# Altium PCB board.PcbDoc (part 1 of 2)
Units mm, origin at the board's own origin, x right, y up, seen from the top; angles counter-clockwise.
Board outline 37.92 x 150 mm, 2 copper layers (Top Layer, Bottom Layer), stack 1.66 mm thick; 126 components, 64 nets, 338 pads, 180 vias.
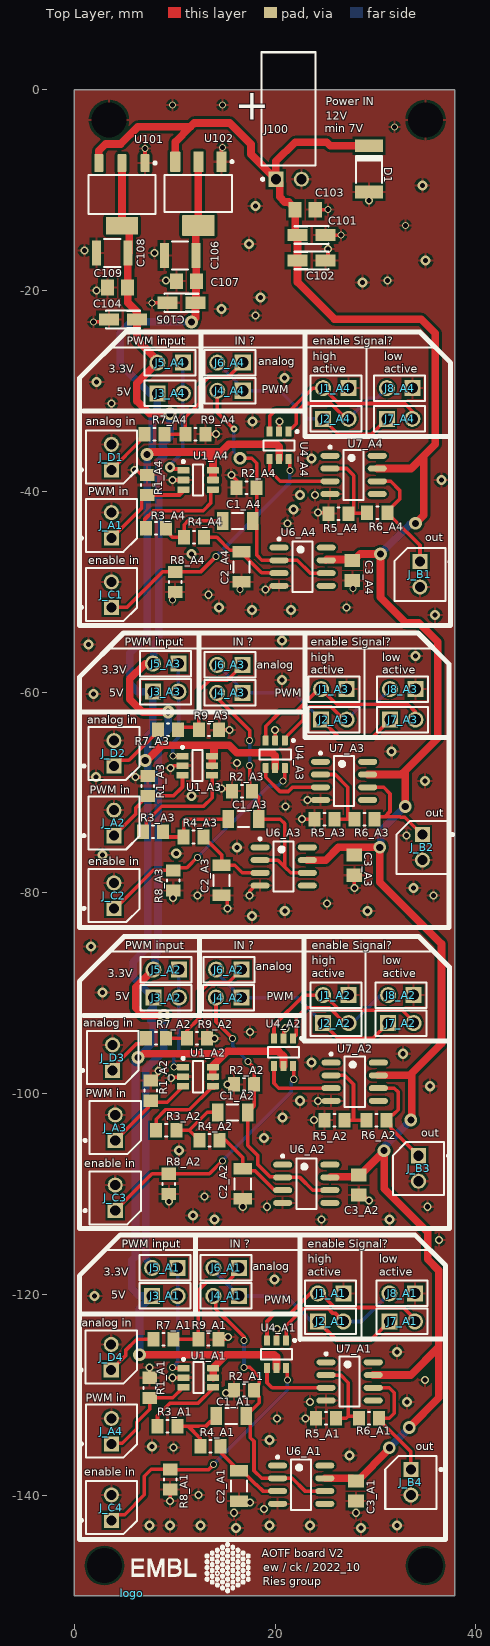
[diagram p0: Top Layer view]
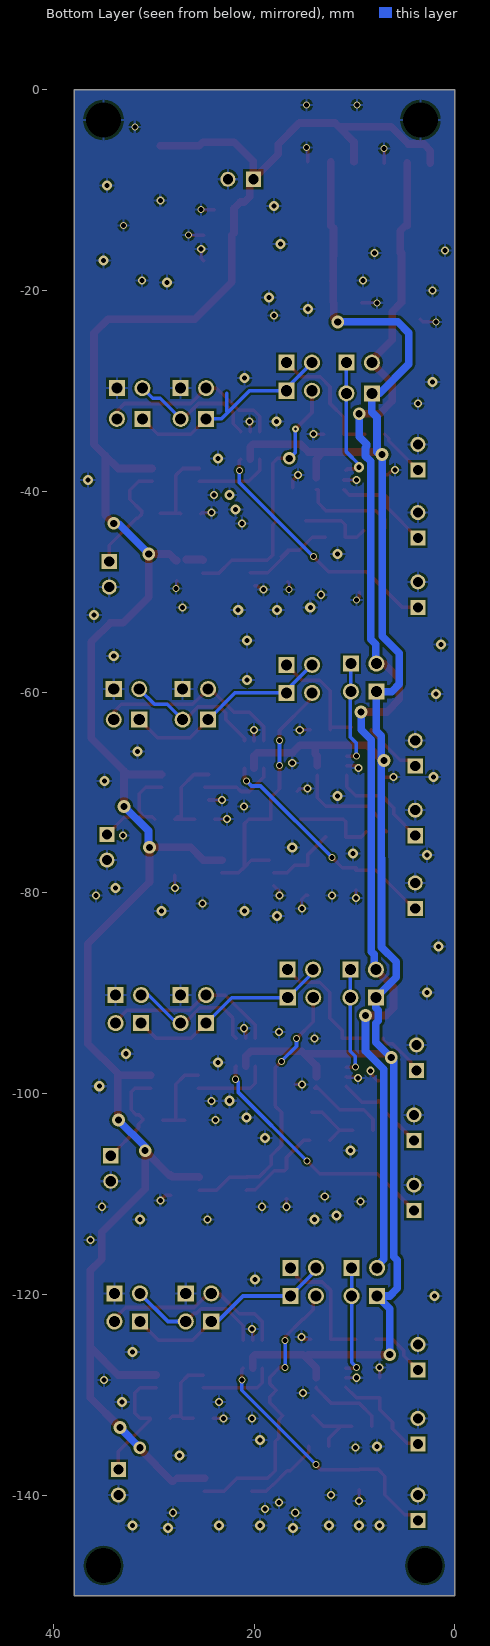
[diagram p1: Bottom Layer view, seen from below]
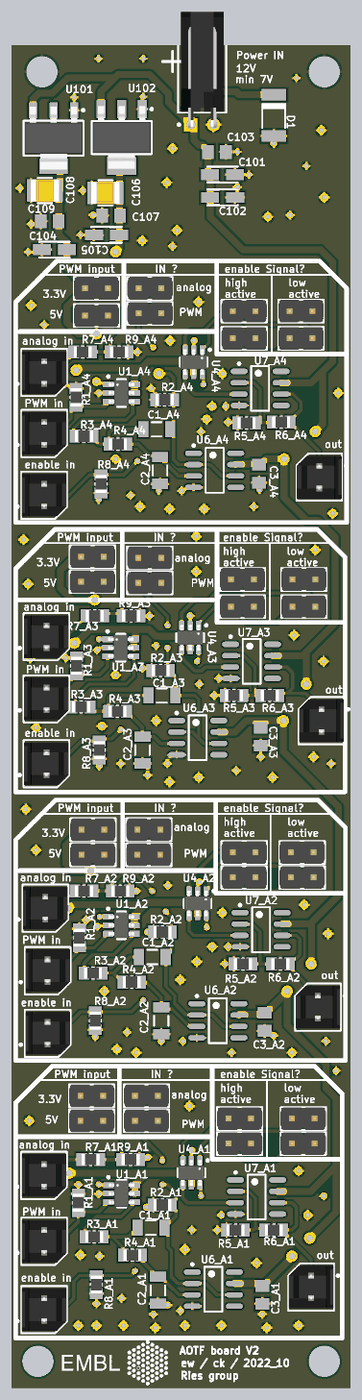
[diagram p3: 3D render of the assembled board from above, using the file's embedded part models]

## Layer stack, top to bottom
Top Solder: solder mask 0.0102, Solder Resist, Dk 3.5
Top Layer: signal copper 0.055
Dielectric1: dielectric 1.55, FR-4, Dk 4.8
Bottom Layer: signal copper 0.055
Bottom Solder: solder mask 0.0102, Solder Resist, Dk 3.5

## Board outline
0,-150 0,0 37.924,0 37.924,-150

## Design rules (kind name [scope] priority, off if disabled: settings)
Clearance clearance_polygons [InNamedPolygon('top_gnd_power')or InNamedPolygon('bottom_gnd_power') vs InNamedPolygon('top_gnd_uc')or InNamedPolygon('bottom_gnd_uc')] p1: gap=1.5 ignorepadtopadclearanceinfootprint=FALSE except(0: Arc-Hole Track-Hole SMDPad-Hole THPad-Hole Via-Hole Fill-Hole Poly-Hole Region-Hole Text-Hole)
Clearance ClearanceRoom [WithinRoom('less')  or WithinRoom('less1') or WithinRoom('less2') or WithinRoom('less3') or WithinRoom('less4')] p2: gap=0.203 ignorepadtopadclearanceinfootprint=FALSE except(0: Arc-Hole Track-Hole SMDPad-Hole THPad-Hole Via-Hole Fill-Hole Poly-Hole Region-Hole Text-Hole)
Clearance clearance_HP_class [InNetClass('high_power_net')] p3: gap=0.381 ignorepadtopadclearanceinfootprint=FALSE except(0: Arc-Hole Track-Hole SMDPad-Hole THPad-Hole Via-Hole Fill-Hole Poly-Hole Region-Hole Text-Hole)
Clearance "clearance_24V class" [InNetClass('24V_net')] p4: gap=0.254 ignorepadtopadclearanceinfootprint=FALSE except(0: Arc-Hole Track-Hole SMDPad-Hole THPad-Hole Via-Hole Fill-Hole Poly-Hole Region-Hole Text-Hole)
Clearance Clearance_1 [All] p5: gap=0.203 ignorepadtopadclearanceinfootprint=FALSE except(0: Arc-Hole Track-Hole SMDPad-Hole THPad-Hole Via-Hole Fill-Hole Poly-Hole Region-Hole Text-Hole)
FabricationTestPointUsage TestPointUsage [All] p1: valid=0 allowmultiple=FALSE
FabricationTestpoint Testpoint [All] p1: side=3 testpointundercomponent=TRUE minsize=1.016 maxsize=2.54 preferedsize=1.524 minholesize=0 maxholesize=1.016 preferedholesize=0.813 testpointgrid=0.025 allowsidetop=TRUE allowsidebottom=TRUE usegrid=TRUE gridtolerance=0
HoleSize [All] p1: absolutevalues=TRUE maxlimit=6 minlimit=0.025 maxpercent=80.000 minpercent=20.000
PolygonConnect PolygonConnect_Power [(InNet('+5V') OR InNet('-24VBUS'))] p1: connectstyle=Relief reliefconductorwidth=2.54 reliefentries=4 polygonreliefangle="90 Angle" airgapwidth=0.254
PolygonConnect [All] p2: connectstyle=Relief reliefconductorwidth=0.254 reliefentries=4 polygonreliefangle="90 Angle" airgapwidth=0.254
RoutingVias "RoutingVias_24V class" [InNetClass('24V_net')] p1: holewidth=0.711 width=1.27 viastyle="Through Hole" minholewidth=0.711 minwidth=1.27 maxholewidth=0.711 maxwidth=1.27
RoutingVias [All] p2: holewidth=0.711 width=1.27 viastyle="Through Hole" minholewidth=0.3 minwidth=0.5 maxholewidth=0.711 maxwidth=1.27
SilkToSolderMaskClearance SilkscreenOverComponentPads [IsPad] p1: minsilkscreentomaskgap=0.254 clearancetoexposedcopper=TRUE
SolderMaskExpansion [All] p1: expansion=0.102 istentingtop=FALSE
Width WidthRoom [WithinRoom('less')  or WithinRoom('less1') or WithinRoom('less2') or WithinRoom('less3') or WithinRoom('less4')] p1: maxlimit=0.356 minlimit=0.356 preferedwidth=0.356
Width Width_HC_class [InNetClass('High_Current_net')] p2: maxlimit=15.24 minlimit=1.524 preferedwidth=1.524
Width Width_HP_class [InNetClass('High_Power_net')] p3: maxlimit=1.016 minlimit=1.016 preferedwidth=1.016
Width "Width_24V class" [InNetClass('24V_net')] p4: maxlimit=0.762 minlimit=0.356 preferedwidth=0.762
Width Width_1 [All] p5: maxlimit=0.356 minlimit=0.356 preferedwidth=0.356
26 further rules are at their usual default settings.

## Classes and differential pairs
component class A1: C1_A1 C2_A1 C3_A1 J1_A1 J2_A1 J3_A1 J4_A1 J5_A1 J6_A1 J7_A1 J8_A1 R1_A1 R2_A1 R3_A1 R4_A1 R5_A1 R6_A1 R7_A1 R8_A1 R9_A1 U1_A1 U4_A1 U6_A1 U7_A1
component class A3: C1_A3 C2_A3 C3_A3 J1_A3 J2_A3 J3_A3 J4_A3 J5_A3 J6_A3 J7_A3 J8_A3 R1_A3 R2_A3 R3_A3 R4_A3 R5_A3 R6_A3 R7_A3 R8_A3 R9_A3 U1_A3 U4_A3 U6_A3 U7_A3
channel class Sheet1: A1 A2 A3 A4
component class A2: C1_A2 C2_A2 C3_A2 J1_A2 J2_A2 J3_A2 J4_A2 J5_A2 J6_A2 J7_A2 J8_A2 R1_A2 R2_A2 R3_A2 R4_A2 R5_A2 R6_A2 R7_A2 R8_A2 R9_A2 U1_A2 U4_A2 U6_A2 U7_A2
component class A4: C1_A4 C2_A4 C3_A4 J1_A4 J2_A4 J3_A4 J4_A4 J5_A4 J6_A4 J7_A4 J8_A4 R1_A4 R2_A4 R3_A4 R4_A4 R5_A4 R6_A4 R7_A4 R8_A4 R9_A4 U1_A4 U4_A4 U6_A4 U7_A4
net class 24V_net: +3,3V +5V +12V
component class sheetPower: C101 C102 C103 C104 C105 C106 C107 C108 C109 D1 J100 U101 U102
component class sheet_top: J_A1 J_A2 J_A3 J_A4 J_B1 J_B2 J_B3 J_B4 J_B6 J_C1 J_C2 J_C3 J_C4 J_D1 J_D2 J_D3 J_D4

## Components (designator, comment, footprint, x,y, rotation, side; value= is the part's Value field where it differs from the comment)
C1_A1 "2.25uF" CAPC1206(3216)190_N 15.64,-132.08 r0 top (schematic designator C1)
C1_A2 "2.25uF" CAPC1206(3216)190_N 15.783,-101.854 r0 top (schematic designator C1)
C1_A3 "2.25uF" CAPC1206(3216)190_N 16.858,-72.644 r0 top (schematic designator C1)
C1_A4 "2.25uF" CAPC1206(3216)190_N 16.269,-42.926 r0 top (schematic designator C1)
C2_A1 "1.13uF" CAPC1206(3216)190_N 16.402,-139.065 r90 top (schematic designator C2)
C2_A2 "1.13uF" CAPC1206(3216)190_N 16.783,-108.966 r90 top (schematic designator C2)
C2_A3 "1.13uF" CAPC1206(3216)190_N 14.685,-78.74 r90 top (schematic designator C2)
C2_A4 "1.13uF" CAPC1206(3216)190_N 16.656,-47.514 r90 top (schematic designator C2)
C3_A1 "100nF" CAPC2013X88X50ML20T25 28.067,-139.573 r90 top (schematic designator C3)
C3_A2 "100nF" CAPC2013X88X50ML20T25 28.34,-109.093 r90 top (schematic designator C3)
C3_A3 "100nF" CAPC2013X88X50ML20T25 27.893,-77.232 r90 top (schematic designator C3)
C3_A4 "100nF" CAPC2013X88X50ML20T25 27.705,-47.879 r90 top (schematic designator C3)
C101 "4,7 µF" "A Package" 22.238,-14.478 r0 top
C102 "4,7 µF" "A Package" 22.244,-17.018 r0 top
C103 "100n" CAPC2013X88X50ML20T25 23.006,-11.938 r180 top
C104 "4,7 µF" "A Package" 6.248,-22.86 r180 top
C105 "4,7 µF" "A Package" 12.071,-21.209 r180 top
C106 "100uF 6.3V 1210" 885012109004-Footprint-1 9.004,-16.51 r0 top
C107 "100n" CAPC2013X88X50ML20T25 11.176,-19.05 r0 top
C108 "100uF 6.3V 1210" 885012109004-Footprint-1 2.234,-16.256 r0 top
C109 "100n" CAPC2013X88X50ML20T25 4.318,-19.685 r0 top
D1 "LL4007" LL4007 29.356,-10.16 r90 top
J1_A1 "61300211121" 61300211121 26.816,-119.888 r180 top (schematic designator J1)
J1_A2 "61300211121" 61300211121 27.324,-90.17 r180 top (schematic designator J1)
J1_A3 "61300211121" 61300211121 27.131,-59.69 r180 top (schematic designator J1)
J1_A4 "61300211121" 61300211121 27.324,-29.718 r180 top (schematic designator J1)
J2_A1 "61300211121" 61300211121 24.276,-122.682 r0 top (schematic designator J2)
J2_A2 "61300211121" 61300211121 24.784,-92.964 r0 top (schematic designator J2)
J2_A3 "61300211121" 61300211121 24.591,-62.738 r0 top (schematic designator J2)
J2_A4 "61300211121" 61300211121 24.784,-32.766 r0 top (schematic designator J2)
J3_A1 "61300211121" 61300211121 7.75,-120.142 r0 top (schematic designator J3)
J3_A2 "61300211121" 61300211121 7.877,-90.424 r0 top (schematic designator J3)
J3_A3 "61300211121" 61300211121 7.827,-59.944 r0 top (schematic designator J3)
J3_A4 "61300211121" 61300211121 8.274,-30.226 r0 top (schematic designator J3)
J4_A1 "61300211121" 61300211121 16.402,-120.142 r180 top (schematic designator J4)
J4_A2 "61300211121" 61300211121 16.656,-90.424 r180 top (schematic designator J4)
J4_A3 "61300211121" 61300211121 16.778,-60.071 r180 top (schematic designator J4)
J4_A4 "61300211121" 61300211121 16.783,-29.972 r180 top (schematic designator J4)
J5_A1 "61300211121" 61300211121 10.29,-117.348 r180 top (schematic designator J5)
J5_A2 "61300211121" 61300211121 10.417,-87.63 r180 top (schematic designator J5)
J5_A3 "61300211121" 61300211121 10.367,-57.15 r180 top (schematic designator J5)
J5_A4 "61300211121" 61300211121 10.814,-27.178 r180 top (schematic designator J5)
J6_A1 "61300211121" 61300211121 16.402,-117.348 r180 top (schematic designator J6)
J6_A2 "61300211121" 61300211121 16.672,-87.63 r180 top (schematic designator J6)
J6_A3 "61300211121" 61300211121 16.778,-57.277 r180 top (schematic designator J6)
J6_A4 "61300211121" 61300211121 16.783,-27.178 r180 top (schematic designator J6)
J7_A1 "61300211121" 61300211121 31.388,-122.682 r0 top (schematic designator J7)
J7_A2 "61300211121" 61300211121 31.261,-92.964 r0 top (schematic designator J7)
J7_A3 "61300211121" 61300211121 31.449,-62.738 r0 top (schematic designator J7)
J7_A4 "61300211121" 61300211121 31.134,-32.766 r0 top (schematic designator J7)
J8_A1 "61300211121" 61300211121 33.928,-119.888 r180 top (schematic designator J8)
J8_A2 "61300211121" 61300211121 33.801,-90.17 r180 top (schematic designator J8)
J8_A3 "61300211121" 61300211121 33.989,-59.69 r180 top (schematic designator J8)
J8_A4 "61300211121" 61300211121 33.674,-29.718 r180 top (schematic designator J8)
J100 "66100211722" 66100211722 21.355,-1.905 r180 top
J_A1 "66100211622" 66100211622 3.702,-44.658 r270 top
J_A2 "66100211622" 66100211622 3.956,-74.295 r270 top
J_A3 "66100211622" 66100211622 4.083,-104.648 r270 top
J_A4 "66100211622" 66100211622 3.702,-134.874 r270 top
J_B1 "66100211622" 66100211622 34.436,-46.99 r90 top
J_B2 "66100211622" 66100211622 34.67,-74.183 r90 top
J_B3 "66100211622" 66100211622 34.29,-106.172 r90 top
J_B4 "66100211622" 66100211622 33.528,-137.43 r90 top
J_C1 "66100211622" 66100211622 3.702,-51.554 r270 top
J_C2 "66100211622" 66100211622 3.956,-81.534 r270 top
J_C3 "66100211622" 66100211622 4.083,-111.633 r270 top
J_C4 "66100211622" 66100211622 3.702,-142.494 r270 top
J_D1 "66100211622" 66100211622 3.702,-37.846 r270 top
J_D2 "66100211622" 66100211622 3.956,-67.354 r270 top
J_D3 "66100211622" 66100211622 3.829,-97.663 r270 top
J_D4 "66100211622" 66100211622 3.683,-127.508 r270 top
logo "EMBL" EMBL 5.715,-149.733 r0 top
R1_A1 "10k" YAGO-RC0805_M 7.512,-129.286 r270 top (schematic designator R1)
R1_A2 "10k" YAGO-RC0805_M 7.62,-99.695 r270 top (schematic designator R1)
R1_A3 "10k" YAGO-RC0805_M 7.319,-69.326 r270 top (schematic designator R1)
R1_A4 "10k" YAGO-RC0805_M 7.258,-39.354 r270 top (schematic designator R1)
R2_A1 "10k" YAGO-RC0805_M 16.91,-129.54 r0 top (schematic designator R2)
R2_A2 "10k" YAGO-RC0805_M 16.924,-99.06 r0 top (schematic designator R2)
R2_A3 "10k" YAGO-RC0805_M 16.717,-69.85 r0 top (schematic designator R2)
R2_A4 "10k" YAGO-RC0805_M 17.164,-39.624 r0 top (schematic designator R2)
R3_A1 "10k" YAGO-RC0805_M 9.29,-133.096 r180 top (schematic designator R3)
R3_A2 "10k" YAGO-RC0805_M 9.163,-103.632 r180 top (schematic designator R3)
R3_A3 "10k" YAGO-RC0805_M 7.827,-73.914 r180 top (schematic designator R3)
R3_A4 "10k" YAGO-RC0805_M 8.147,-43.688 r180 top (schematic designator R3)
R4_A1 "10k" YAGO-RC0805_M 13.559,-135.128 r180 top (schematic designator R4)
R4_A2 "10k" YAGO-RC0805_M 13.481,-104.648 r180 top (schematic designator R4)
R4_A3 "10k" YAGO-RC0805_M 11.891,-74.422 r180 top (schematic designator R4)
R4_A4 "10k" YAGO-RC0805_M 11.941,-44.577 r180 top (schematic designator R4)
R5_A1 "1k" YAGO-RC0805_M 25.082,-132.334 r0 top (schematic designator R5)
R5_A2 "1k" YAGO-RC0805_M 25.908,-102.616 r0 top (schematic designator R5)
R5_A3 "1k" YAGO-RC0805_M 24.909,-72.644 r0 top (schematic designator R5)
R5_A4 "1k" YAGO-RC0805_M 26.308,-42.218 r0 top (schematic designator R5)
R6_A1 "1k" YAGO-RC0805_M 29.356,-132.334 r0 top (schematic designator R6)
R6_A2 "1k" YAGO-RC0805_M 30.099,-102.616 r0 top (schematic designator R6)
R6_A3 "1k" YAGO-RC0805_M 28.909,-72.644 r0 top (schematic designator R6)
R6_A4 "1k" YAGO-RC0805_M 30.182,-42.118 r0 top (schematic designator R6)
R7_A1 "1k" YAGO-RC0805_M 8.893,-124.46 r180 top (schematic designator R7)
R7_A2 "1k" YAGO-RC0805_M 8.147,-94.488 r180 top (schematic designator R7)
R7_A3 "1k" YAGO-RC0805_M 9.351,-63.754 r180 top (schematic designator R7)
R7_A4 "1k" YAGO-RC0805_M 8.004,-34.29 r180 top (schematic designator R7)
R8_A1 "10k" YAGO-RC0805_M 9.544,-138.43 r270 top (schematic designator R8)
R8_A2 "10k" YAGO-RC0805_M 9.417,-108.966 r270 top (schematic designator R8)
R8_A3 "10k" YAGO-RC0805_M 9.859,-78.74 r270 top (schematic designator R8)
R8_A4 "10k" YAGO-RC0805_M 10.052,-49.022 r270 top (schematic designator R8)
R9_A1 "1.5k" YAGO-RC0805_M 13.354,-124.46 r180 top (schematic designator R9)
R9_A2 "1.5k" YAGO-RC0805_M 12.211,-94.488 r180 top (schematic designator R9)
R9_A3 "1.5k" YAGO-RC0805_M 13.415,-63.754 r180 top (schematic designator R9)
R9_A4 "1.5k" YAGO-RC0805_M 12.068,-34.29 r180 top (schematic designator R9)
U1_A1 "SN74LVC1T45DBVT" DBV0006A_M 12.354,-128.27 r0 top (schematic designator U1)
U1_A2 "SN74LVC1T45DBVT" DBV0006A_M 12.324,-98.298 r0 top (schematic designator U1)
U1_A3 "SN74LVC1T45DBVT" DBV0006A_M 12.258,-67.31 r0 top (schematic designator U1)
U1_A4 "SN74LVC1T45DBVT" DBV0006A_M 12.338,-38.862 r0 top (schematic designator U1)
U4_A1 "SN74LVC1G3157" DBV0006A_N 21.101,-124.57 r270 top (schematic designator U4)
U4_A2 "SN74LVC1G3157" DBV0006A_N 21.797,-94.488 r270 top (schematic designator U4)
U4_A3 "SN74LVC1G3157" DBV0006A_N 20.969,-64.814 r270 top (schematic designator U4)
U4_A4 "SN74LVC1G3157" DBV0006A_N 21.355,-34.036 r270 top (schematic designator U4)
U6_A1 "AD8029ARZ" ADI-R-8_L 22.606,-138.938 r0 top (schematic designator U6)
U6_A2 "AD8029ARZ" ADI-R-8_L 23.114,-108.966 r0 top (schematic designator U6)
U6_A3 "AD8029ARZ" ADI-R-8_L 20.862,-77.358 r0 top (schematic designator U6)
U6_A4 "AD8029ARZ" ADI-R-8_L 22.752,-47.498 r0 top (schematic designator U6)
U7_A1 "AD8029ARZ" ADI-R-8_L 27.432,-128.651 r0 top (schematic designator U7)
U7_A2 "AD8029ARZ" ADI-R-8_L 27.94,-98.806 r0 top (schematic designator U7)
U7_A3 "AD8029ARZ" ADI-R-8_L 26.877,-68.834 r0 top (schematic designator U7)
U7_A4 "AD8029ARZ" ADI-R-8_L 27.832,-38.354 r0 top (schematic designator U7)
U101 "LM1117IMP-3.3/NOPB" DCY0004A_N 4.75,-10.414 r270 top
U102 "LM1117IMP-5.0/NOPB" DCY0004A_M 12.359,-10.335 r270 top

## Footprints (in the part's own frame and the unit in brackets; to place one, negate y for a bottom-side part, rotate by r counter-clockwise, add the part's x,y. Pads: shape width x height; smd on the part's side, far side on the other; paste and mask are expansions set on the pad)
61300211121 [mm] "2Pol; gerade; WR-PHD 2.54 mm THT Pin Header"
  rect 1.6x1.6 hole 1.1: 1(0,0)
  round 1.6 hole 1.1: 2(2.54,0)
  silkscreen extent -1.27,-1.27 3.81,1.27, body extent -1.27,-1.27 3.81,1.27, height 8.57
66100211622 [mm] "2 Pins, stehend 2.54mm Intercom Stiftleiste WR-WTB"
  rect 1.5x1.5 hole 1: 1(0,0)
  round 1.5 hole 1: 2(-2.54,0)
  silkscreen extent -3.91,-3.12 1.37,2.55, body extent -3.66,-2.5 1.12,2.5, height 11.33
66100211722 [mm] "2.54 mm Intercom Male Right Angled Shrouded Locking Header, 2p"
  rect 1.5x1.5 hole 1: 1(1.27,7)
  round 1.5 hole 1: 2(-1.27,7)
  silkscreen extent -2.69,-5.65 2.72,7.12, body extent -2.39,-5.6 2.39,7.32, height 5.05
885012109004-Footprint-1 [mm]
  rect 0.9x2.5 smd: 1(0,0) 2(3.1,0)
  silkscreen extent 0.75,-1.4 2.35,1.4, body extent -0.05,-1.25 3.15,1.25, height 2.5
"A Package" [mm] "A Package; Low Density"
  rect 2x1.2 smd: 1(0,0) 2(2.8,0)
  silkscreen extent -0.3,-0.9 3.1,0.9
ADI-R-8_L [mm] "SOIC, 8-Leads, Body 4.9x3.9mm, Pitch 1.27mm, IPC High Density"
  oval 1.9x0.6 smd: 1(-2.35,1.905) 2(-2.35,0.635) 3(-2.35,-0.635) 4(-2.35,-1.905) 5(2.35,-1.905) 6(2.35,-0.635) 7(2.35,0.635) 8(2.35,1.905)
  silkscreen extent -2.47,-2.5 1,2.88, body extent -2,-2.5 2,2.5, height 1.75
CAPC1206(3216)190_N [mm] "Chip Capacitor, Body 3.2x1.6mm, Height 1.9mm, IPC Medium Density"
  rect 1.15x1.8 smd: 1(-1.5,0) 2(1.5,0)
  silkscreen extent -0.55,-0.8 0.55,0.8, body extent -1.7,-0.9 1.7,0.9, height 1.9
CAPC2013X88X50ML20T25 [mm] "Chip Capacitor, 2-Leads, Body 2.00x1.25mm, IPC Low Density"
  rect 1.3x1.55 smd: 1(-1,0) 2(1,0)
  body extent -1.1,-0.72 1.1,0.72, height 0.88
DBV0006A_M [mm] "SOT23, 6-Leads, Body 3.05x1.75mm, Pitch 0.95mm, IPC Low Density"
  rrect15% 1.2x0.65 smd: 1(-1.475,0.95) 2(-1.475,0) 3(-1.475,-0.95) 4(1.475,-0.95) 5(1.475,0) 6(1.475,0.95)
  silkscreen extent -1.6,-1.55 0.5,1.95, body extent -1.42,-1.46 1.42,1.46, height 1.11
DBV0006A_N [mm] "SOT23, 6-Leads, Body 3.05x1.75mm, Pitch 0.95mm, IPC Medium Density"
  rrect17% 1x0.6 smd: 1(0,0) 2(0,-0.95) 3(0,-1.9) 4(2.75,-1.9) 5(2.75,-0.95) 6(2.75,0)
  silkscreen extent -0.12,-2.5 1.88,0.98, body extent -0.05,-2.41 2.8,0.51, height 1.11
DCY0004A_M [mm] "SOT223, 4-Leads, Body 6.7x3.7mm, Pitch 2.3mm, IPC Low Density"
  rrect10% 2.05x1 smd: 1(-3.175,2.3) 2(-3.175,0) 3(-3.175,-2.3)
  rrect5% 2.05x3.25 smd: 4(3.175,0)
  silkscreen extent -3.3,-3.35 1.85,3.48, body extent -3.5,-3.25 3.5,3.25, height 1.62
DCY0004A_N [mm] "SOT223, 4-Leads, Body 6.7x3.7mm, Pitch 2.3mm, IPC Medium Density"
  rrect11% 1.75x0.9 smd: 1(-3.125,2.3) 2(-3.125,0) 3(-3.125,-2.3)
  rrect6% 1.75x3.2 smd: 4(3.125,0)
  silkscreen extent -3.25,-3.35 1.95,3.43, body extent -3.5,-3.25 3.5,3.25, height 1.62
EMBL [mm] "12 x 5mm"
  silkscreen extent -0.01,0.04 11.83,5.08
LL4007 [mm] "MELF Diode, 2-Leads, Body 5,00x2,50mm, IPC High Density"
  rect 1.279x2.75 smd: 1(0,0) 2(4.6,0)
  silkscreen extent 0.9,-1.28 3.57,1.28, body extent -0.3,-1.34 4.9,1.35, height 2.69
YAGO-RC0805_M [mm] "Chip Resistor, 2-Leads, Body 2.00x1.25mm, IPC Low Density"
  rect 1.2x1.45 smd: 1(-1,0) 2(1,0)
  silkscreen extent -0.1,-0.63 0.1,0.63, body extent -1,-0.62 1,0.63, height 0.6

## Part data
C1_A1 C1_A2 C1_A3 C1_A4 C2_A1 C2_A2 C2_A3 C2_A4: library part CMP-001-0138-A.1, "CAP CER 1UF 10V X7R 1206", Manufacturer="Wurth Electronics Inc.", Manufacturer Part Number=885012208013, Operating Temperature="-55°C ~ 125°C", Package / Case="1206 (3216 Metric)", Ratings=-, Supplier Part Number=732-7685-1-ND, Temperature Coefficient=X7R, Tolerance=±10%, Voltage - Rated=10V, Applications="General Purpose", ComponentLink1Description=885012208013.pdf, ComponentLink1URL=http://katalog.we-online.de/pbs/datasheet/885012208013.pdf, Features=-, Height - Seated (Max)=-, Lead Spacing=-, Lead Style=-, Mounting Type="Surface Mount, MLCC", Notification="Current market demand for these product types have resulted in fluctuating and extending lead times. Lead times may differ.", Packaging="Cut Tape (CT)", Part Status=Active, Size / Dimension="0.126\" L x 0.063\" W (3.20mm x 1.60mm)", Supplier=Digi-Key, Thickness (Max)="0.051\" (1.30mm)"
C3_A1 C3_A2 C3_A3 C3_A4 C103 C107 C109: library part CMP-001-0082-2, "generic 0805 COG oder X7R Vielschichtkondensatoren max. +/-10%"
C101 C102 C104 C105: library part CMP-001-0039-3, "4,7 µF; 6V; Gr. A; T491A475K006AT", Capacitance=4.7µF, ESR (Equivalent Series Resistance)="6 Ohm", Lifetime @ Temp.="2000 Hrs @ 85°C", Manufacturer=KEMET, Manufacturer Size Code=A, Operating Temperature="-55°C ~ 125°C", Package / Case="1206 (3216 Metric)", PartNumber=T491A475K006AT, Supplier Part Number=399-9717-1-ND, Tolerance=±10%, Voltage - Rated=6.3V, ComponentLink1Description=KEM_T2005_T491.pdf, ComponentLink1URL=http://www.kemet.com/Lists/ProductCatalog/Attachments/254/KEM_T2005_T491.pdf, Failure Rate=-, Features="General Purpose", Height - Seated (Max)="0.071\" (1.80mm)", Lead Spacing=-, Mounting Type="Surface Mount", Packaging="Cut Tape (CT)", Part Status=Active, Size / Dimension="0.126\" L x 0.063\" W (3.20mm x 1.60mm)", Supplier=Digi-Key, Type=Molded
C106 C108: library part CMP-001-0186-3, "Ceramic Capacitor, Ceramic, 100uF, 6.3V", Capacitor Type=Ceramic, PartNumber=885012109004, Dielectric Material=Ceramic, Number of Pins=2, REACH SVHC=Yes, RoHS Compliant=Yes
D1: library part CMP-001-0049-2, "LL4007;  Vf 1,1V @ 1A, If = 1A", Betriebstemperatur, max.=175, Manufacturer="TAIWAN SEMICONDUCTOR", PartNumber="LL4007G L2", Supplier Part Number=2677381, Anzahl der Pins=-, Bauform - Diode=DO-213, ComponentLink1Description=2182652.pdf, ComponentLink1URL=http://www.farnell.com/datasheets/2182652.pdf, Diodenkonfiguration=Einfach, Durchlassspannung Vf max.=1.1, Durchlassstrom (mittlerer) If(AV)=1, Periodische Sperrspannung Vrrm, max.=1, Produktpalette=-, Sperrerholzeit Trr, max.=-, Spitzendurchlassstrom Ifsm, max.=25, Supplier=Farnell, SVHC="No SVHC (20-Jun-2016", Verpackung=Gurtabschnitt
J1_A1 J1_A2 J1_A3 J1_A4 J2_A1 J2_A2 J2_A3 J2_A4 J3_A1 J3_A2 J3_A3 J3_A4 J4_A1 J4_A2 J4_A3 J4_A4 J5_A1 J5_A2 J5_A3 J5_A4 J6_A1 J6_A2 J6_A3 J6_A4 J7_A1 J7_A2 J7_A3 J7_A4 J8_A1 J8_A2 J8_A3 J8_A4: library part CMP-001-0071-1, "2Pol; gerade; WR-PHD 2.54 mm THT Pin Header", Current Rating="3 A", Flammability Rating="UL 94 V-0", Insulation Resistance="1 GOhms", Manufacturer="Wurth Electronics", Supplier Part Number=710-61300211121, Voltage Rating="250 V", Accessory Type=-, Application="Wire to Board", Brand="Wurth Electronics", ComponentLink1Description=6130xx11121-538006.pdf, ComponentLink1URL=http://www.mouser.com/ds/2/445/6130xx11121-538006.pdf, Contact Gender="Pin (Male)", Contact Material="Copper Alloy", Contact Plating=Gold, Contact Type=-, Housing Gender=-, Housing Material="Polybutylene Terephthalate (PBT)", Latching Type=Unlatched, Manufacturer Part Number=61300211121, Mating Post Length="6 mm", Minimum Order Quantity=1, Mounting Angle=Straight, Mounting Style="Straight Pin", Number of Positions="2 Position", Number of Rows="1 Row", Packaging=Bulk, PartNumber=61300211121, Pitch="2.54 mm", Product=Headers, Reeling=False, RoHS - Mouser=Y, Row Spacing=-, Series=WR-PHD, Standard Pack Qty=1000, Supplier=Mouser, Termination Post Length="3 mm", Termination Style="Through Hole", Type="Pin Strip"
J100: library part CMP-00524-A.1, "Intercom Male Shrouded Locking Header WR-WTB, THT, Right Angled, pitch 2.54 mm, 1 x 2 position", Contact Resistance=20mOhm, Manufacturer="Wurth Elektronik", Operating Temperature=-40to125degC, Working Voltage=50VAC, Datasheet URL=https://katalog.we-online.de/em/datasheet/6610xx11722.pdf, Gender=Male, Manufacturer URL=http://www.we-online.de, Mounting Technology=THT, Orientation=RightAngled, Package Reference=66100211722, Packaging=Box, Part Number=66100211722, Pitch=2.54mm, Position=1x2, Publisher=WurthElektronik
J_A1 J_A2 J_A3 J_A4 J_B1 J_B2 J_B3 J_B4 J_C1 J_C2 J_C3 J_C4 J_D1 J_D2 J_D3 J_D4: library part CMP-001-0161-A.3, "WR-WTB 2.54 mm Male Vertical Shrouded Header 2 Pins", Manufacturer="Wurth Electronics", Supplier Part Number=732-14102-ND, PartNumber=66100211622, Supplier=Digi-Key
logo: library part "EMBL gebembel"
R1_A1 R1_A2 R1_A3 R1_A4 R2_A1 R2_A2 R2_A3 R2_A4 R3_A1 R3_A2 R3_A3 R3_A4 R4_A1 R4_A2 R4_A3 R4_A4 R5_A1 R5_A2 R5_A3 R5_A4 R6_A1 R6_A2 R6_A3 R6_A4 R7_A1 R7_A2 R7_A3 R7_A4 R8_A1 R8_A2 R8_A3 R8_A4 R9_A1 R9_A2 R9_A3 R9_A4: library part CMP-001-0027-2, "0805 Yageo Standard BlackBox Resistors", Manufacturer=Yageo, Operating Temperature="-55°C ~ 155°C", Package / Case="0805 (2012 Metric)", Power (Watts)="0.125W, 1/8W", Supplier Device Package=0805, Temperature Coefficient=±200ppm/°C, Tolerance=±1%, ComponentLink1Description=PYu-RC_Group_51_RoHS_L_7.pdf, ComponentLink1URL=http://www.yageo.com/documents/recent/PYu-RC_Group_51_RoHS_L_7.pdf, Composition="Thick Film", Failure Rate=-, Features="Moisture Resistant", Height - Seated (Max)="0.024\" (0.60mm)", Packaging=Digi-Reel®, Part Status=Active, Size / Dimension="0.079\" L x 0.049\" W (2.00mm x 1.25mm)"
U1_A1 U1_A2 U1_A3 U1_A4: library part CMP-00492-1, "Single-Bit Dual-Supply Bus Transceiver with Configurable Voltage Translation and 3-State Outputs, DBV0006A, SMALL T&R", F @ Nom Voltage(Max)(Mhz)=150, Generic Part Number=SN74LVC1T45, ICC @ Nom Voltage(Max)(mA)=0.004, Manufacturer="Texas Instruments", Operating Temperature Range(C)="-40 to 85", Rating=Catalog, tpd @ Nom Voltage(Max)(ns)=15.5,8,5.8,4.4, Voltage(Nom)(V)=1.8,2.5,3.3,5, 3-State Output=Yes, Bits(#)=1, DatasheetVersion=SCES515K, Input Type=CMOS/TTL, Logic=True, Output Drive (IOL/IOH)(Max)(mA)=32/-32, Output Type=CMOS, PackageReference=DBV0006A, Schmitt Trigger=No, Sub-Family="Dual Supply Translator", Technology Family=LVC, VCC(Max)(V)=5.5, VCC(Min)(V)=1.65
U4_A1 U4_A2 U4_A3 U4_A4: library part CMP-001-0106-A.1, "Analoger Schalter Single SPDT(Wechsler) SOT23-6", Channel Capacitance (CS(off), CD(off))=5.2pF, Current - Leakage (IS(off)) (Max)=1µA, Manufacturer="Texas Instruments", Manufacturer Part Number=74LVC1G3157DBVRE4, On-State Resistance (Max)="15 Ohm", Operating Temperature="-40°C ~ 85°C (TA)", Package / Case=SOT-23-6, PartNumber=SN74LVC1G3157DBVR, Supplier Part Number=74LVC1G3157DBVRE4-ND, Voltage - Supply, Dual (V±)=-, Voltage - Supply, Single (V+)="1.65 V ~ 5.5 V", -3db Bandwidth=300MHz, Channel-to-Channel Matching (&Delta;Ron)="100 mOhm", Charge Injection=7pC, ComponentLink1Description=sn74lvc1g3157.pdf, ComponentLink1URL=http://www.ti.com/lit/ds/symlink/sn74lvc1g3157.pdf, Crosstalk="-54dB @ 10MHz", Multiplexer/Demultiplexer Circuit=2:1, Packaging="Tape & Reel (TR)", Part Status=Active, Supplier=Digi-Key, Supplier Device Package=SOT-23-6, Switch Circuit=SPDT, Switch Time (Ton, Toff) (Max)="5.7ns, 3.8ns"
U6_A1 U6_A2 U6_A3 U6_A4 U7_A1 U7_A2 U7_A3 U7_A4: library part CMP-00480-1, "Single Channel RRIO Operational Amplifier, 125 MHz BW, 62 V/us SR, Industrial, 8-pin SOIC (R-8), Tube", Amplifiers Per Package=1, Generic Part Number=AD8029, Input Bias Current=700nA, Input Offset Voltage=1.6mV, Manufacturer="Analog Devices", Code_JEDEC=MS-012-AA, ComponentLink1Description="Manufacturer URL", ComponentLink1URL=http://www.analog.com/en/index.html, ComponentLink2Description=Datasheet, ComponentLink2URL=http://www.analog.com/static/imported-files/data_sheets/AD8029_8030_8040.pdf, ComponentLink3Description="Package Specification", ComponentLink3URL=http://www.analog.com/static/imported-files/packages/PKG_PDF/SOIC_Narrow%20(R)/R_8.pdf, DatasheetVersion="Rev. B", Iq/Amp=1.5mA, Mounting Technology="Surface Mount", PackageDescription="8-Pin Standard Small Outline Package, Body 3.9 x 4.9 mm, Pitch 1.27 mm", PackageReference=R-8, PackageVersion=060506-A, PartNumber=AD8029ARZ, Slew Rate=62V/us, Small Signal Bandwidth=125MHz, V Span Max=12V, V Span Min=2.7V
U101: library part CMP-00484-1, "800mA Low-Dropout Linear Regulator, 4-pin SOT-223, Pb-Free", Manufacturer="Texas Instruments", PackageTopMarking=XYTT*N05B, PowerWise=N, Code_IPC=SOT223-4, Code_JEDEC=TO-261-AA, ComponentLink1Description="Datasheet URL", ComponentLink1URL=http://www.ti.com/general/docs/lit/getliterature.tsp?genericPartNumber=LM1117-N&fileType=pdf, CompType="LDO IC", High-Reliability=Y, PackageDescription="Molded SOT-223, 6.50 x 3.56 x 1.6mm Body, 4 Lead, 2.3mm Pitch", PackageReference=DCY0004A, PartNumber=LM1117IMP-3.3/NOPB, PinCount=4, RoHS=Y
U102: library part CMP-00485-1, "800mA Low-Dropout Linear Regulator, 4-pin SOT-223, Pb-Free", Manufacturer="Texas Instruments", PackageTopMarking=XYTT*N06B, PowerWise=N, Code_IPC=SOT223-4, Code_JEDEC=TO-261-AA, ComponentLink1Description="Datasheet URL", ComponentLink1URL=http://www.ti.com/general/docs/lit/getliterature.tsp?genericPartNumber=LM1117-N&fileType=pdf, CompType="LDO IC", High-Reliability=Y, PackageDescription="Molded SOT-223, 6.50 x 3.56 x 1.6mm Body, 4 Lead, 2.3mm Pitch", PackageReference=DCY0004A, PartNumber=LM1117IMP-5.0/NOPB, PinCount=4, RoHS=Y

## Free pads (board coordinates)
  round 3.302 hole 3.505 unplated: 0(3,-147) 0(3.448,-3) 0(35,-147) 0(35,-3)

## Via types
v1: diameter 0.8, hole 0.5, Top Layer to Bottom Layer, 69 vias
v2: diameter 1, hole 0.5, Top Layer to Bottom Layer, 63 vias
v3: diameter 0.7, hole 0.5, Top Layer to Bottom Layer, 30 vias
v4: diameter 1.27, hole 0.711, Top Layer to Bottom Layer, 17 vias
v5: diameter 0.7, hole 0.3, Top Layer to Bottom Layer, 1 vias

## Nets (pads, with @x,y where several pads share a name; then routed paths per layer and width w, separated by ;. In a path a pad name is that pad's centre, name@x,y a point inside that pad or via, vN(x,y) a via of type N, cw(c..) or ccw(c..) an arc to the next point about the centre after c; other vN are vias at no path point)
+3,3V: C104.1 C108.2 C109.2 J5_A1.2 J5_A2.2 J5_A3.2 J5_A4.2 U101.2 U101.4 | length 125.3
  Top Layer w0.762: U101.2@4.75,-7.289 U101.4@4.75,-13.539 4.967,-13.539 5.461,-14.033 C108.2@5.461,-16.256 ; C108.2@5.334,-16.256 5.334,-21.184 6.248,-22.098 C104.1@6.248,-22.86 6.248,-24.898 8.274,-26.924 J5_A4.2@8.274,-27.178 6.242,-29.21 6.242,-30.988 7.512,-32.258 v4(9.544,-32.258) ; J5_A3.2@7.827,-57.15 7.065,-57.15 5.541,-58.674 5.541,-60.706 6.811,-61.976 v4(9.351,-61.976) ; J5_A2.2@7.877,-87.63 6.121,-89.386 6.121,-91.446 6.877,-92.202 v4(8.909,-92.202)
  Bottom Layer w0.762: J5_A1.2@7.75,-117.348 7.75,-117.121 7.112,-116.483 7.112,-97.539 8.909,-95.742 v4(8.909,-92.202) ; J5_A3.2@7.827,-57.15 7.905,-57.072 7.905,-55.207 8.401,-54.711 8.401,-37.013 8.912,-36.501 8.912,-35.635 8.782,-35.504 8.782,-35.306 9.544,-34.544 v4(9.544,-32.258) ; J5_A2.2@7.877,-87.63 8.037,-87.47 8.037,-86.129 8.335,-85.831 8.335,-76.962 8.354,-76.943 8.354,-64.751 9.351,-63.754 v4(9.351,-61.976) ; J5_A4.2@8.274,-27.178 J5_A4.2@8.274,-26.924
+5V: C105.1 C106.2 C107.2 J3_A1.1 J3_A2.1 J3_A3.1 J3_A4.1 U1_A1.5 U1_A1.6 U1_A2.5 U1_A2.6 U1_A3.5 U1_A3.6 U1_A4.5 U1_A4.6 U4_A1.5 U4_A2.5 U4_A3.5 U4_A4.5 U102.2 U102.4 | length 207.2
  Top Layer w0.762: v4(6.35,-96.393) 6.487,-96.393 6.868,-96.012 15.005,-96.012 ; v4(6.496,-125.984) 14.624,-125.984 14.878,-126.238 15.132,-125.984 ; v4(7.065,-66.802) 7.215,-66.802 8.739,-65.278 13.923,-65.278 ; v4@7.512,-36.068 13.1,-36.068 ; v4(11.684,-23.114) 12.071,-22.727 C105.1@12.071,-21.209 12.124,-21.156 12.124,-19.102 C107.2@12.176,-19.05 12.14,-19.014 12.14,-16.546 C106.2@12.104,-16.51 12.104,-13.765 U102.4@12.359,-13.51 U102.2@12.359,-7.16 ; U1_A3.5@13.733,-67.3 U1_A3.6@13.733,-66.36 13.923,-66.17 13.923,-65.278 ; U1_A2.5@13.799,-98.288 U1_A2.6@13.799,-97.348 13.799,-97.218 15.005,-96.012 ; U1_A4.5@13.813,-38.608 13.813,-36.781 13.1,-36.068 ; U1_A1.5@13.829,-128.26 U1_A1.6@13.829,-127.32 13.829,-127.287 15.132,-125.984 ; U4_A3.5@20.019,-67.564 20.019,-66.36 19.699,-66.04 16.657,-66.04 16.638,-66.021 16.19,-66.021 15.447,-65.278 13.923,-65.278 ; U4_A1.5@20.151,-127.32 20.151,-126.208 19.927,-125.984 15.132,-125.984 ; U4_A4.5@20.405,-36.786 20.405,-35.563 20.148,-35.306 15.386,-35.306 14.624,-36.068 13.1,-36.068 ; U4_A2.5@20.847,-97.238 20.847,-96.266 20.339,-95.758 15.259,-95.758 15.005,-96.012
  Bottom Layer w0.762: v4(6.35,-96.393) 6.35,-96.53 6.096,-96.784 6.096,-116.224 5.734,-116.586 5.734,-119.38 6.496,-120.142 J3_A1.1@7.75,-120.142 6.496,-121.396 v4(6.496,-125.984) ; v4(6.35,-96.393) 7.877,-94.867 7.877,-92.966 7.639,-92.728 7.639,-91.676 7.877,-91.438 J3_A2.1@7.877,-90.424 5.861,-88.408 5.861,-86.868 7.319,-85.41 7.319,-76.541 7.338,-76.522 7.338,-67.075 v4(7.065,-66.802) 7.319,-66.802 7.338,-66.783 7.338,-64.33 7.827,-63.841 J3_A3.1@7.827,-59.944 6.303,-59.944 5.541,-59.182 5.541,-56.134 7.258,-54.417 v4(7.258,-36.322) 7.766,-36.068 7.766,-32.599 8.274,-32.091 J3_A4.1@8.274,-30.226 7.512,-30.226 4.591,-27.305 4.591,-24.217 5.694,-23.114 v4(11.684,-23.114)
+12V: C3_A1.2 C3_A2.2 C3_A3.2 C3_A4.2 C101.1 C102.1 C103.2 D1.2 J100.1 U6_A1.7 U6_A2.7 U6_A3.7 U6_A4.7 U7_A1.7 U7_A2.7 U7_A3.7 U7_A4.7 U101.3 U102.3 | length 241.3
  Top Layer w0.762: U101.3@2.45,-7.289 2.45,-6.065 3.127,-5.388 4.645,-5.388 6.35,-3.683 11.576,-3.683 ; U102.3@10.059,-7.16 10.059,-5.2 11.576,-3.683 ; U6_A3.7@23.212,-76.723 25.052,-76.723 26.322,-75.453 v4(30.433,-75.453) 30.433,-78.928 36.576,-85.071 36.576,-94.996 33.601,-97.971 ; U6_A1.7@24.956,-138.303 C3_A1.2@27.672,-138.303 ; U6_A4.7@25.102,-46.863 25.183,-46.782 26.77,-46.782 ; U6_A2.7@25.464,-108.331 25.545,-108.25 28.183,-108.25 C3_A2.2@28.34,-108.093 28.465,-108.093 v4@30.861,-105.697 ; C3_A4.2@27.705,-46.879 27.83,-46.879 28.481,-46.228 v4(30.499,-46.228) 30.499,-50.546 33.039,-53.086 34.309,-53.086 36.214,-54.991 36.214,-64.582 32.973,-67.823 ; C3_A1.2@28.067,-138.573 28.192,-138.573 31.388,-135.377 v4(31.388,-135.255) ; U7_A3.7@29.227,-68.199 32.597,-68.199 32.973,-67.823 ; D1.2@29.356,-5.56 25.49,-5.56 25.137,-5.207 22.006,-5.207 20.085,-7.128 J100.1@20.085,-8.905 ; U7_A1.7@29.782,-128.016 33.528,-128.016 36.322,-125.222 ; U7_A4.7@30.182,-37.719 33.547,-37.719 34.817,-36.449 ; U7_A2.7@30.29,-98.171 33.401,-98.171 33.601,-97.971 ; v4(30.861,-105.664) v4@30.861,-105.697 ; v4(32.973,-71.374) 32.973,-67.823 ; v4(33.365,-133.244) 36.322,-130.286 36.322,-125.222 ; v4(33.528,-102.616) 33.601,-102.543 33.601,-97.971 ; v4(33.989,-43.18) 34.817,-42.352 34.817,-36.449 ; 11.576,-3.683 11.957,-3.302 15.494,-3.302 17.605,-5.413 17.605,-6.425 J100.1@20.085,-8.905 ; J100.1@20.085,-8.905 20.454,-9.274 20.454,-10.656 20.974,-11.176 21.369,-11.176 22.006,-11.813 C103.2@22.006,-11.938 22.006,-14.259 22.225,-14.478 C101.1@22.238,-14.478 22.241,-14.481 22.241,-17.015 C102.1@22.244,-17.018 22.244,-19.177 25.927,-22.86 34.563,-22.86 35.96,-24.257 35.96,-35.306 34.817,-36.449 ; v4@30.861,-105.697 30.861,-109.474 35.198,-113.811 35.198,-116.478 36.322,-117.602 36.322,-125.222
  Bottom Layer w0.762: v4@30.494,-75.514 v4(30.433,-75.453) 30.53,-75.356 30.53,-73.817 v4(32.973,-71.374) ; v4(30.499,-46.228) 33.45,-43.277 33.892,-43.277 v4(33.989,-43.18) ; v4(30.861,-105.664) 30.861,-105.283 v4(33.528,-102.616) ; v4(31.388,-135.255) 33.401,-133.242 33.401,-133.223 33.38,-133.244 v4(33.365,-133.244)